# Altium PCB Farm_Assistor_Final.PcbDoc
Units mm, origin at the board's own origin, x right, y up, seen from the top; angles counter-clockwise.
Board outline 64.01 x 58.55 mm, 2 copper layers (Top Layer, Bottom Layer); 46 components, 33 nets, 172 pads, 102 vias.
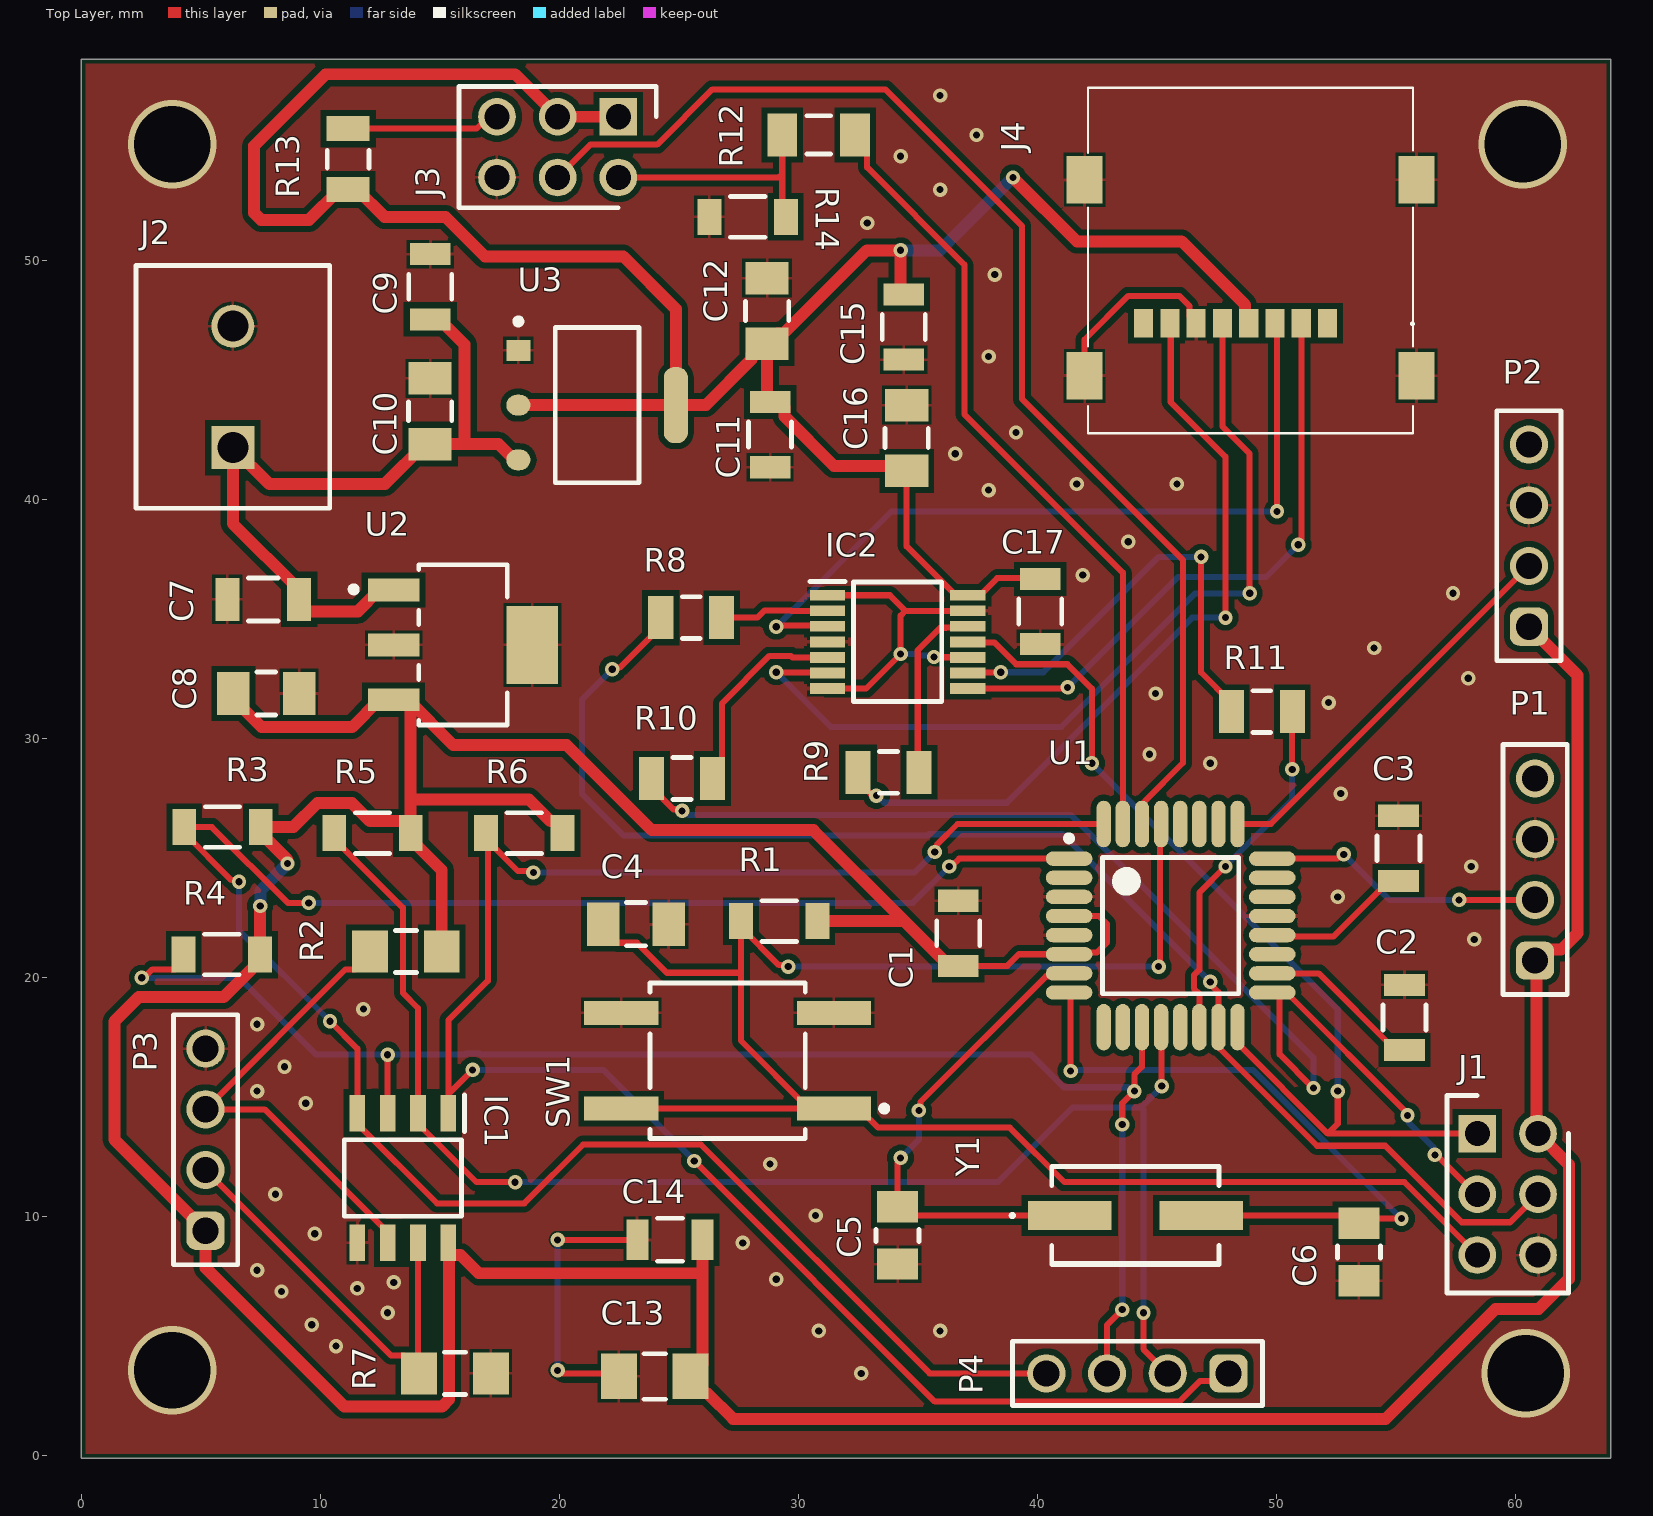
[diagram p0: Top Layer view]
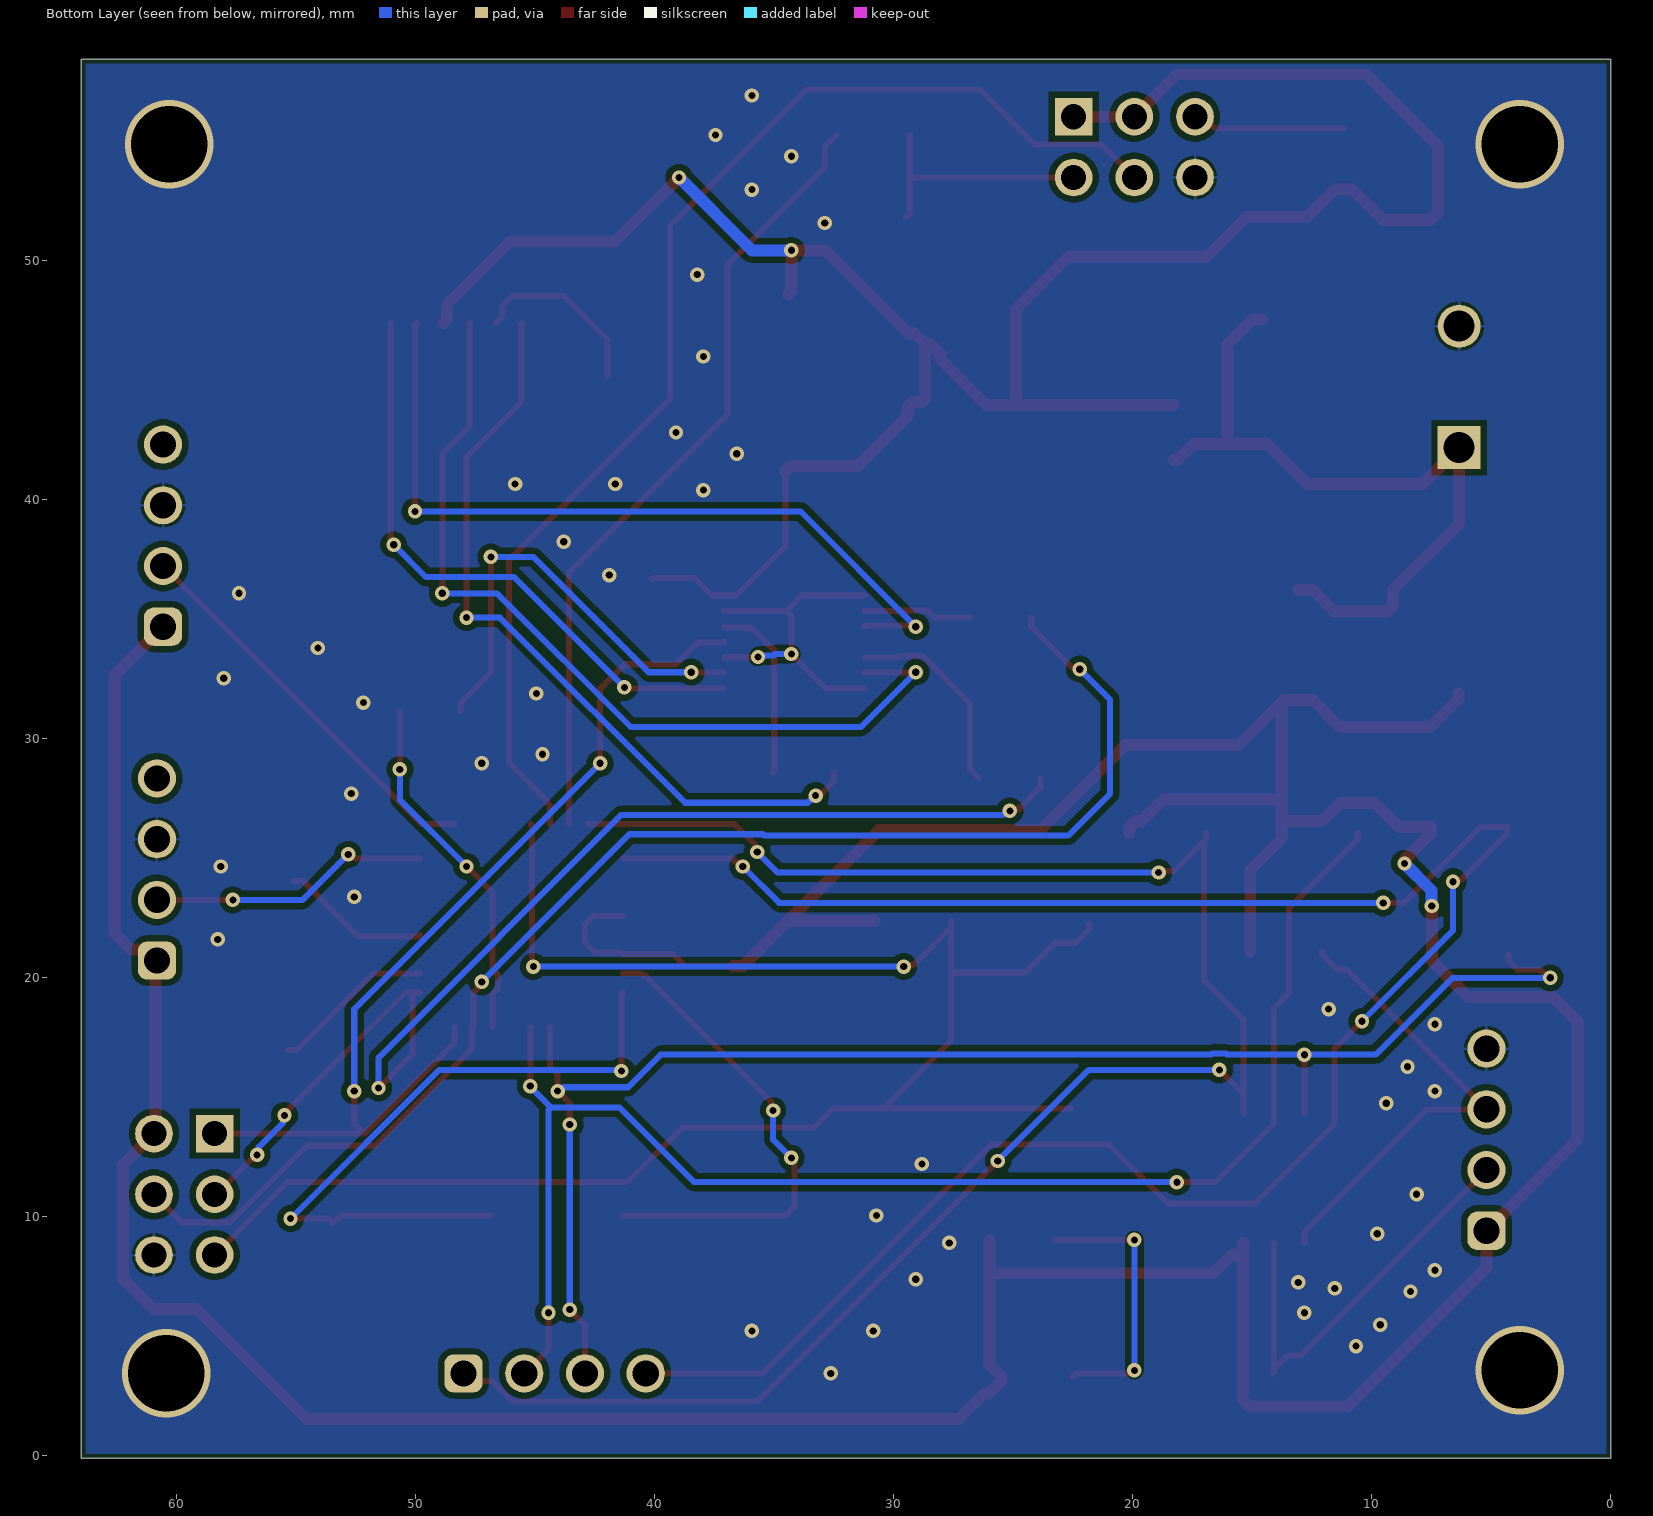
[diagram p1: Bottom Layer view, seen from below]
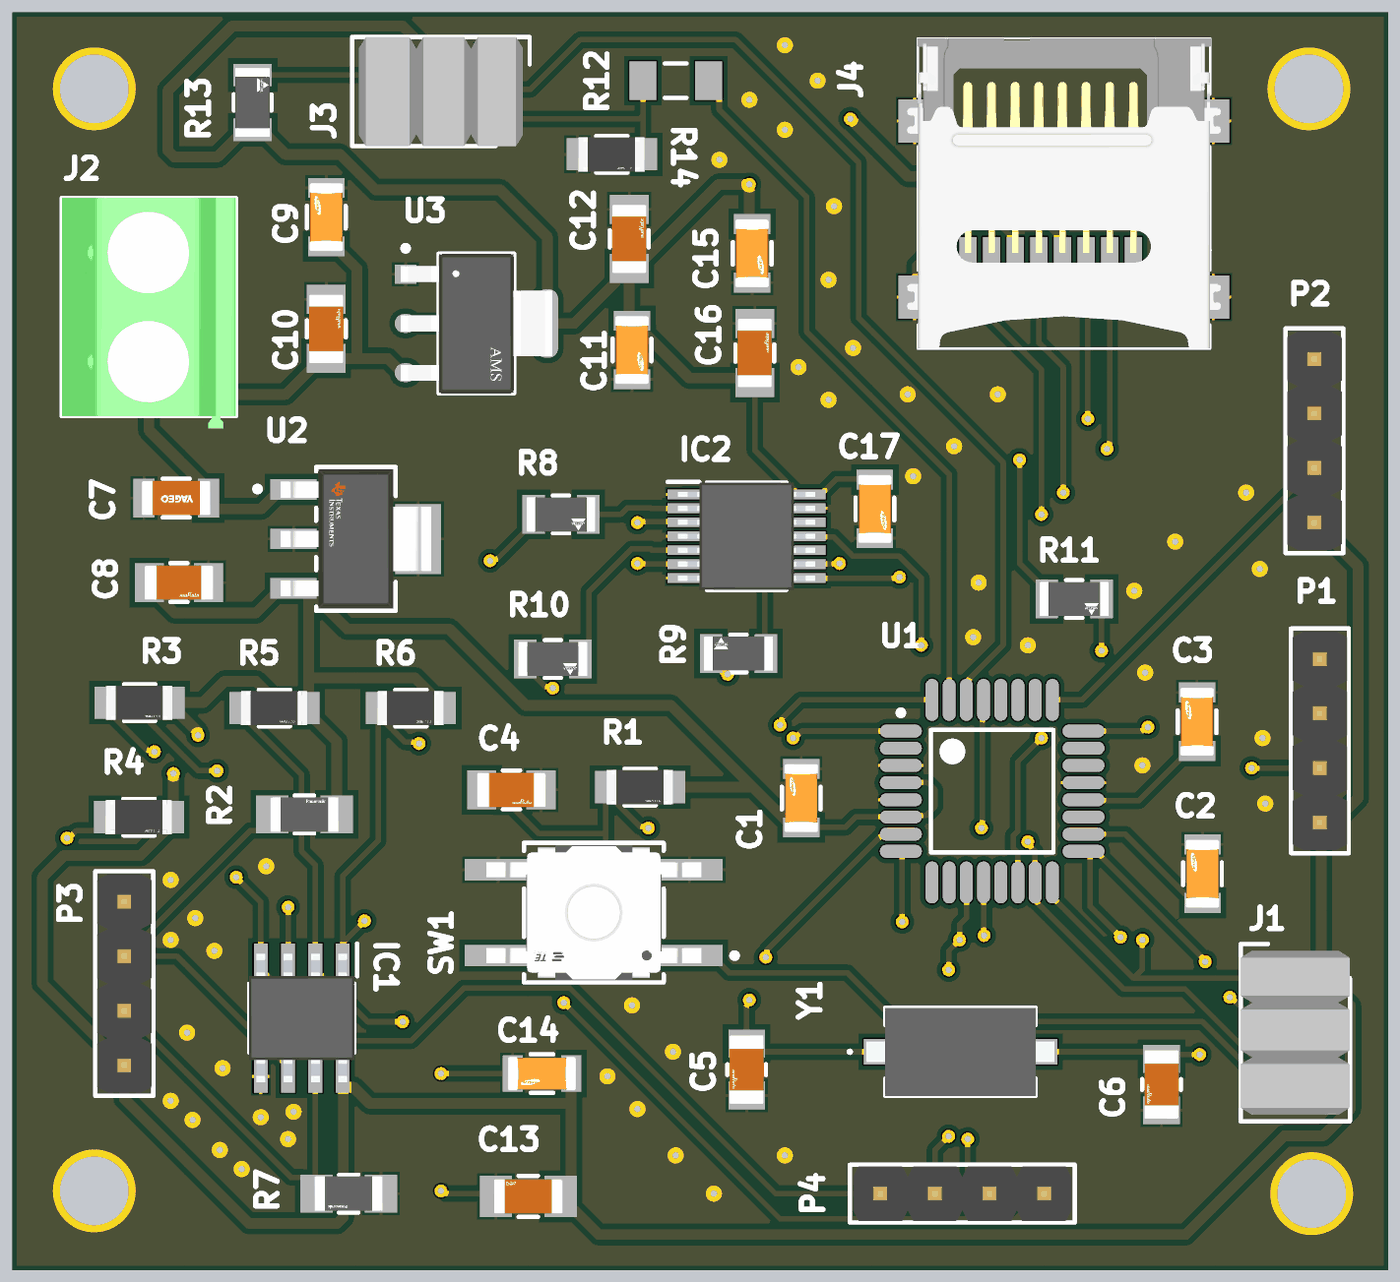
[diagram p2: 3D render of the assembled board from above, using the file's embedded part models]

## Layer stack, top to bottom
Top Solder: solder mask 0.0102, Solder Resist, Dk 3.5
Top Layer: signal copper 0.0356
Dielectric 1: dielectric 0.32, FR-4, Dk 4.8
Bottom Layer: signal copper 0.0356
Bottom Solder: solder mask 0.0102, Solder Resist, Dk 3.5

## Board outline
0,-0.127 64.008,-0.127 64.008,58.42 0,58.42

## Design rules (kind name [scope] priority, off if disabled: settings)
BoardOutlineClearance [All] p1: gap=0.2 ignorepadtopadclearanceinfootprint=FALSE
Clearance [All] p1: gap=0.254 ignorepadtopadclearanceinfootprint=FALSE except(0.127: SMDPad-SMDPad)
ComponentClearance [All] p1: gap=0.127 collisioncheckmode=3 verticalgap=0.127 showdistances=TRUE
DiffPairsRouting [All] p1: maxlimit=0.254 minlimit=0.127 mostfreqgap=0.127 toplayer_minwidth=0.127 toplayer_maxwidth=25.4 toplayer_prefwidth=0.127 bottomlayer_minwidth=0.127 bottomlayer_maxwidth=25.4 bottomlayer_prefwidth=0.127 maxuncoupledlength=12.7
Height [All] p1: minheight=0 maxheight=1816.048 prefheight=12.7
HoleSize [All] p1: absolutevalues=TRUE maxlimit=6.3 minlimit=0.3 maxpercent=80.000 minpercent=20.000
HoleToHoleClearance [All] p1: gap=0.5 allowstackedmicrovias=FALSE
MinimumAnnularRing [All] p1: minimumring=0.076
MinimumSolderMaskSliver [All] p1: minsoldermaskwidth=0
PlaneClearance [All] p1: clearance=0.127
PlaneConnect PlaneConnectPowerPads [InPadClass('PowerPads')] p1: planeconnectstyle=Direct reliefexpansion=0.508 reliefentries=4 reliefconductorwidth=0.254 reliefairgap=0.254
PlaneConnect [All] p2: pad.planeconnectstyle=Relief pad.reliefexpansion=0.3 pad.reliefentries=4 pad.reliefconductorwidth=0.127 pad.reliefairgap=0.127 via.planeconnectstyle=Direct via.reliefexpansion=0.3 via.reliefentries=4 via.reliefconductorwidth=0.127 via.reliefairgap=0.127
PolygonConnect PolygonConnectPowerPads [All vs (InPadClass('PowerPads'))] p1: connectstyle=Direct reliefconductorwidth=0.254 reliefentries=4 polygonreliefangle="90 Angle" airgapwidth=0.254
PolygonConnect [All] p2: thpad.connectstyle=Relief thpad.reliefconductorwidth=0.127 thpad.reliefentries=4 thpad.polygonreliefangle="90 Angle" thpad.airgapwidth=0.127 smdpad.connectstyle=Relief smdpad.reliefconductorwidth=0.127 smdpad.reliefentries=4 smdpad.polygonreliefangle="90 Angle" smdpad.airgapwidth=0.127 via.connectstyle=Direct via.reliefconductorwidth=0.127 via.reliefentries=4 via.polygonreliefangle="90 Angle" via.airgapwidth=0.127
RoutingVias [All] p1: holewidth=0.3 width=0.6 viastyle="Through Hole" minholewidth=0.3 minwidth=0.6 maxholewidth=3.6 maxwidth=6.6
SilkToSilkClearance [All] p1: silktosilkclearance=0
SilkToSolderMaskClearance [IsPad] p1: minsilkscreentomaskgap=0 clearancetoexposedcopper=TRUE
SolderMaskExpansion [All] p1: expansion=0.075 istentingtop=FALSE
UnRoutedNet [All] p1: checkbadconnections=TRUE
Width [All] p1: maxlimit=0.5 minlimit=0.2 preferedwidth=0.254
19 further rules are at their usual default settings.

## Classes and differential pairs
component class "Sensor inputs": C13 C14 IC1 P1 P2 P3 P4 R2 R3 R4 R5 R6 R7
component class Power: C7 C8 C9 C10 C11 C12 U2 U3
component class MCU: C1 C2 C3 C4 C5 C6 J1 R1 SW1 U1 Y1
component class "Data Logger": C15 C16 C17 IC2 J4 R8 R9 R10 R11 R12 R13

## Components (designator, comment, footprint, x,y, rotation, side; value= is the part's Value field where it differs from the comment)
C1 "CL31B106KBHNNNE" FP-CL31B106KBHNNNE-MFG 36.703,21.844 r90 top value=10uF
C2 "CL31B106KBHNNNE" FP-CL31B106KBHNNNE-MFG 55.372,18.323 r90 top value=10uF
C3 "CL31B106KBHNNNE" FP-CL31B106KBHNNNE-MFG 55.118,25.4 r90 top value=10uF
C4 "GRM31C5C1H104JA01L" FP-GRM31C-0_2-e0_3_0_8-IPC_B 23.22,22.225 r0 top
C5 "GRM31A5C2J220JW01D" FP-GRM31A-0_2-e0_3_0_95-IPC_C 34.163,9.202 r270 top
C6 "GRM31A5C2J220JW01D" FP-GRM31A-0_2-e0_3_0_95-IPC_C 53.467,8.509 r270 top
C7 "CC1206KKX7R0BB334" FP-CC1206-0_3-1_8-MFG 7.62,35.814 r180 top value=330nF
C8 "GRM31C5C1H104JA01L" FP-GRM31C-0_2-e0_3_0_8-IPC_B 7.747,31.877 r0 top
C9 "CL31B106KBHNNNE" FP-CL31B106KBHNNNE-MFG 14.605,48.895 r90 top value=10uF
C10 "GRM31C5C1H104JA01L" FP-GRM31C-0_2-e0_3_0_8-IPC_B 14.605,43.688 r90 top
C11 "CL31B106KBHNNNE" FP-CL31B106KBHNNNE-MFG 28.829,42.707 r270 top value=10uF
C12 "GRM31C5C1H104JA01L" FP-GRM31C-0_2-e0_3_0_8-IPC_B 28.702,47.879 r90 top
C13 "12061C105K4T2A" FP-1206-L_3_2_0_2-W_1_6_0-IPC_A 24.003,3.302 r180 top
C14 "CL31B106KBHNNNE" FP-CL31B106KBHNNNE-MFG 24.638,9.017 r180 top value=10uF
C15 "CL31B106KBHNNNE" FP-CL31B106KBHNNNE-MFG 34.417,47.209 r270 top value=10uF
C16 "GRM31C5C1H104JA01L" FP-GRM31C-0_2-e0_3_0_8-IPC_B 34.544,42.566 r90 top
C17 "CL31B106KBHNNNE" FP-CL31B106KBHNNNE-MFG 40.132,35.306 r270 top value=10uF
IC1 "MAX485CSA+" SOIC127P600X175-8N 13.462,11.602 r270 top
IC2 "74LVC125APW-Q100J" SOP65P640X110-14N 34.163,34.036 r0 top
J1 "10-89-7062" HDRV6W87P254_2X3_775X508X864P 58.42,13.462 r270 top
J2 "1729128" PHOE-1729128-2_V 6.35,44.704 r90 top
J3 "10-89-7062" HDRV6W87P254_2X3_775X508X864P 22.479,56.007 r180 top
J4 "MEM2067-02-180-00-A" MEM20670218000A 48.929,45.171 r0 top
P1 "61300411121" 61300411121 60.833,24.511 r90 top
P2 "61300411121" 61300411121 60.579,38.481 r90 top
P3 "61300411121" 61300411121 5.207,13.208 r90 top
P4 "61300411121" 61300411121 44.196,3.429 r180 top
R1 "RT1206BRD0710KL" FP-RT1206-MFG 29.21,22.352 r0 top value=10KΩ
R2 "ERA8AEB203V" FP-ERA8A-IPC_A 13.589,21.082 r0 top
R3 "RT1206BRD0710KL" FP-RT1206-MFG 5.918,26.289 r0 top value=10KΩ
R4 "RT1206BRD0710KL" FP-RT1206-MFG 5.893,20.955 r0 top value=10KΩ
R5 "RT1206BRD0710KL" FP-RT1206-MFG 12.192,26.035 r0 top value=10KΩ
R6 "RT1206BRD0710KL" FP-RT1206-MFG 18.542,26.035 r0 top value=10KΩ
R7 "ERA8AEB203V" FP-ERA8A-IPC_A 15.644,3.429 r180 top
R8 "CRCW12063K30FKEA" FP-CRCW1206-e3-MFG 25.527,35.052 r0 top
R9 "CRCW12063K30FKEA" FP-CRCW1206-e3-MFG 33.782,28.575 r180 top
R10 "CRCW12063K30FKEA" FP-CRCW1206-e3-MFG 25.146,28.321 r0 top
R11 "CRCW12063K30FKEA" FP-CRCW1206-e3-MFG 49.403,31.115 r0 top
R12 "RT1206FRE071KL" RESC3116X65X40ML10T20 30.862,55.245 r0 top value=1k
R13 "CRCW12063K30FKEA" FP-CRCW1206-e3-MFG 11.176,54.234 r90 top
R14 "RT1206BRD072K2L" FP-RT1206-MFG 27.889,51.816 r0 top value=2.2KΩ
SW1 "1571634-2" FP-1571634-2-MFG 27.051,16.51 r180 top
U1 "ATmega328P-AU" 32A_M 45.587,22.166 r0 top
U2 "LM7805MP/NOPB" FP-DCY0004A-MFG 15.981,33.909 r0 top
U3 "AMS1117-3.3" FP-AMS1117-IPC_C 21.59,43.942 r0 top
Y1 "ECS-160-20-3X-TR" ECS160203XTR 44.113,10.033 r0 top

## Footprints (in the part's own frame and the unit in brackets; to place one, negate y for a bottom-side part, rotate by r counter-clockwise, add the part's x,y. Pads: shape width x height; smd on the part's side, far side on the other; paste and mask are expansions set on the pad)
32A_M [mm] "Thin QFP, 32-Leads, Body 7x7mm, Pitch 0.8mm, IPC Low Density"
  oval 1.95x0.6 smd: 1(-4.25,2.8) 2(-4.25,2) 3(-4.25,1.2) 4(-4.25,0.4) 5(-4.25,-0.4) 6(-4.25,-1.2) 7(-4.25,-2) 8(-4.25,-2.8) 17(4.25,-2.8) 18(4.25,-2) 19(4.25,-1.2) 20(4.25,-0.4) 21(4.25,0.4) 22(4.25,1.2) 23(4.25,2) 24(4.25,2.8)
  oval 0.6x1.95 smd: 9(-2.8,-4.25) 10(-2,-4.25) 11(-1.2,-4.25) 12(-0.4,-4.25) 13(0.4,-4.25) 14(1.2,-4.25) 15(2,-4.25) 16(2.8,-4.25) 25(2.8,4.25) 26(2,4.25) 27(1.2,4.25) 28(0.4,4.25) 29(-0.4,4.25) 30(-1.2,4.25) 31(-2,4.25) 32(-2.8,4.25)
  silkscreen extent -4.37,-2.85 2.85,3.77, body extent -3.5,-3.5 3.5,3.5, height 1.2
61300411121 [mm] "Pin Header, pitch 2.54 mm, THT, Vertical, single row, 4p"
  rrect50% 1.6x1.6 hole 1.1: 1(-3.81,0)
  round 1.6 hole 1.1: 2(-1.27,0) 3(1.27,0) 4(3.81,0)
  silkscreen extent -5.23,-1.35 5.23,1.35, body extent -5.08,-1.27 5.08,1.27, height 8.57
ECS160203XTR [mm]
  rect 3.5x1.2 smd: 1(-2.75,0) 2(2.75,0)
  silkscreen extent -5.2,-2.05 3.5,2.05, body extent -4.38,-2.05 4.38,2.05, height 2.4
FP-1206-L_3_2_0_2-W_1_6_0-IPC_A [mm]
  rect 1.505x1.906 smd paste+0 mask+0: 1(-1.501,0) 2(1.501,0)
  silkscreen extent -0.45,-0.95 0.45,0.95, body extent -2.75,-1.45 2.75,1.45, height 0.25
FP-1571634-2-MFG [mm]
  rect 3.1x1 smd paste+0 mask+0: 1(-4.45,2) 2(4.45,2) 3(-4.45,-2) 4(4.45,-2)
  silkscreen extent -6.68,-3.25 3.25,3.25, body extent -6.1,-3.35 6.1,3.35, height 0.25
FP-AMS1117-IPC_C [mm]
  rect 1.004x0.872 smd paste+0 mask+0: 1(-3.295,2.29)
  rrect100% 1.004x0.872 smd paste+0 mask+0: 2(-3.295,0) 3(-3.295,-2.29)
  rrect87% 1.004x3.182 smd paste+0 mask+0: 4(3.295,0)
  silkscreen extent -3.42,-3.25 1.75,3.62, body extent -3.9,-3.35 3.9,3.35, height 0.25
FP-CC1206-0_3-1_8-MFG [mm]
  rect 1x1.8 smd paste+0 mask+0: 1(-1.5,0) 2(1.5,0)
  silkscreen extent -0.63,-0.9 0.63,0.9, body extent -2.32,-1.38 2.32,1.38, height 0.25
FP-CL31B106KBHNNNE-MFG [mm]
  rect 0.925x1.7 smd paste+0 mask+0: 1(-1.362,0) 2(1.362,0)
  silkscreen extent -0.53,-0.9 0.53,0.9, body extent -1.92,-1 1.92,1, height 0.25
FP-CRCW1206-e3-MFG [mm]
  rect 1.05x1.8 smd paste+0 mask+0: 1(-1.275,0) 2(1.275,0)
  silkscreen extent -0.38,-0.87 0.38,0.87, body extent -1.9,-1 1.9,1, height 0.25
FP-DCY0004A-MFG [mm]
  rect 2.15x0.95 smd paste+0 mask+0: 1(-2.9,2.3) 2(-2.9,0) 3(-2.9,-2.3)
  rect 2.15x3.25 smd paste+0 mask+0: 4(2.9,0)
  silkscreen extent -4.7,-3.35 1.85,3.35, body extent -4.08,-3.45 4.08,3.45, height 0.25
FP-ERA8A-IPC_A [mm]
  rect 1.505x1.762 smd paste+0 mask+0: 1(-1.501,0) 2(1.501,0)
  silkscreen extent -0.45,-0.88 0.45,0.88, body extent -2.75,-1.38 2.75,1.38, height 0.25
FP-GRM31A-0_2-e0_3_0_95-IPC_C [mm]
  rect 1.304x1.706 smd paste+0 mask+0: 1(-1.201,0) 2(1.201,0)
  silkscreen extent -0.25,-0.9 0.25,0.9, body extent -1.95,-1 1.95,1, height 0.25
FP-GRM31C-0_2-e0_3_0_8-IPC_B [mm]
  rect 1.355x1.806 smd paste+0 mask+0: 1(-1.376,0) 2(1.376,0)
  silkscreen extent -0.4,-0.9 0.4,0.9, body extent -2.3,-1.15 2.3,1.15, height 0.25
FP-RT1206-MFG [mm]
  rect 1x1.5 smd paste+0 mask+0: 1(-1.6,0) 2(1.6,0)
  silkscreen extent -0.72,-0.85 0.72,0.85, body extent -2.2,-0.95 2.2,0.95, height 0.25
HDRV6W87P254_2X3_775X508X864P [mm]
  rect 1.575x1.575 hole 1.05: 1(0,0)
  round 1.575 hole 1.05: 2(0,2.54) 3(2.54,0) 4(2.54,2.54) 5(5.08,0) 6(5.08,2.54)
  silkscreen extent -1.59,-1.27 6.67,3.81, body extent -1.27,-1.27 6.35,3.81, height 8.38
MEM20670218000A [mm]
  rect 1.5x2 smd: MP1(-6.945,0) MP2(6.945,0) MP3(6.945,8.2) MP4(-6.945,8.2)
  rect 0.8x1.2 smd: P1(3.225,2.2) P2(2.125,2.2) P3(1.025,2.2) P4(-0.075,2.2) P5(-1.175,2.2) P6(-2.275,2.2) P7(-3.375,2.2) P8(-4.475,2.2)
  silkscreen extent -6.8,-2.4 6.82,12.05, body extent -7.3,-2.4 7.3,12.06, height 1.8
PHOE-1729128-2_V [mm] "Receptacle, 2-Leads, Body 8.1x10.16mm, Pitch 5.08mm"
  rect 1.8x1.8 hole 1.3: 1(-2.54,0)
  round 1.8 hole 1.3: 2(2.54,0)
  silkscreen extent -5.08,-4.05 5.08,4.05, body extent -5.65,-4.05 5.08,4.05, height 10.01
RESC3116X65X40ML10T20 [mm] "Chip Resistor, 2-Leads, Body 3.10x1.60mm, IPC Low Density"
  rect 1.25x1.8 smd: 1(-1.525,0) 2(1.525,0)
  silkscreen extent -0.5,-0.8 0.5,0.8, body extent -1.6,-0.85 1.6,0.85, height 0.65
SOIC127P600X175-8N [mm]
  rect 1.525x0.65 smd: 1(-2.712,1.905) 2(-2.712,0.635) 3(-2.712,-0.635) 4(-2.712,-1.905) 5(2.712,-1.905) 6(2.712,-0.635) 7(2.712,0.635) 8(2.712,1.905)
  silkscreen extent -3.47,-2.45 1.6,2.58, body extent -3,-2.45 3,2.45, height 1.75
SOP65P640X110-14N [mm]
  rect 1.475x0.45 smd: 1(-2.938,1.95) 2(-2.938,1.3) 3(-2.938,0.65) 4(-2.938,0) 5(-2.938,-0.65) 6(-2.938,-1.3) 7(-2.938,-1.95) 8(2.938,-1.95) 9(2.938,-1.3) 10(2.938,-0.65) 11(2.938,0) 12(2.938,0.65) 13(2.938,1.3) 14(2.938,1.95)
  silkscreen extent -3.67,-2.5 1.85,2.52, body extent -3.2,-2.5 3.2,2.5, height 1.1

## Part data
C1 C2 C3 C9 C11 C14 C15 C17: library part CMP-2000-07530-2, "CAP CER 10UF 50V X7R 1206", Capacitance=10uF, Manufacturer=Samsung, Temperature="-55°C to +125°C", Temperature Characteristic=X7R, Temperature Coefficient=15%, Temperature Range High=+125°C, Temperature Range Low=-55°C, Tolerance=10%, Voltage Rating=50V, Automotive=No, Category=Cap, ComponentLink2Description=Datasheet, ComponentLink2URL=http://www.samsungsem.com/global/front/downloadcms.do?path=%2F%2Fglobal%2F%2Fsupport%2F%2Fproduct-search%2F%2Fmlcc%2F%2F__icsFiles%2F%2Fafieldfile%2F%2F2019%2F%2F06%2F%2F18&fileName=CL31B106KBHNNNE-19.pdf, Device Class L1="Passive Components", Device Class L2=Capacitors, Device Class L3="Ceramic Capacitors", Digikey Description="CAP CER 10UF 50V X7R 1206", Height=1.8mm, Lead Free=Yes, Manufacturer Part Number=CL31B106KBHNNNE, Material=Ceramic, Octopart=https://octopart.com/cl31b106kbhnnne-samsung-30507377, Package=CL31B106KBHNNNE, RoHS=TRUE
C4 C8 C10 C12 C16: library part CMP-06035-003994-1, "Chip Multilayer Ceramic Capacitors for General Purpose, 1206, 0.10uF, C0G, 30ppm/°C, 5%, 50V", Capacitance=100nF, Case Code (Imperial)=1206, Case Code (Metric)=3216, Dielectric=C0G, Max Operating Temperature=125°C, Min Operating Temperature=-55°C, Package Quantity=1, Temperature Coefficient=30ppm/°C, Tolerance=5%, Voltage=50V, Case/Package=1206, Depth=1.6mm, Height=1.6mm, Lead Free="Lead Free", Length=3.2mm, Material=Ceramic, Mount="Surface Mount", Packaging="Tape and Reel", Radiation Hardening=No, REACH SVHC="No SVHC", Termination=SMD/SMT, Thickness=0.071inch, Voltage Rating=50V, Voltage Rating (DC)=50V, Weight=0.000571oz, Width=0.063inch
C5 C6: library part CMP-06035-015531-1, "Chip Multilayer Ceramic Capacitors for General Purpose, 1206, 22pF, C0G, 30ppm/°C, 5%, 630V", Capacitance=22pF, Case Code (Imperial)=1206, Case Code (Metric)=3216, Dielectric=C0G, Max Operating Temperature=125°C, Min Operating Temperature=-55°C, Package Quantity=4000, Tolerance=5%, Voltage=630V, Case/Package=1206, Depth=1.6mm, Height=1mm, Lead Free="Lead Free", Length=3.2mm, Mount="Surface Mount", Packaging="Tape and Reel", Radiation Hardening=No, REACH SVHC="No SVHC", Termination=SMD/SMT, Thickness=0.039inch, Voltage Rating=630V, Voltage Rating (DC)=630V, Width=0.063inch
C7: library part CMP-03422-001408-1, "CAP CER X7R 1206", RoHS Compliant=Yes
C13: library part CMP-04427-018965-1, "Automotive Ceramic Capacitor, 1206, 1uF, 10%, X7R, 15%,", Capacitance=1uF, Case Code (Imperial)=1206, Case Code (Metric)=3216, Dielectric=X7R, Max Operating Temperature=125°C, Min Operating Temperature=-55°C, Ratings=AEC-Q200, Tolerance=10%, Voltage Rating=100V, Case/Package=1206, Construction=Flat, Depth=1.6mm, Height=0.94mm, Lead Free="Lead Free", Length=3.2mm, Mount="Surface Mount", Packaging="Tape and Reel", Radiation Hardening=No, REACH SVHC="No SVHC", RoHS Compliant=Yes, Series=-, Termination=SMD/SMT, Thickness=0.06inch, Voltage Rating (DC)=100V, Weight=0.000571oz, Width=0.063inch
IC1: "Integrated Circuit", Manufacturer_Name="Analog Devices", Mouser Part Number=700-MAX485CSA, Arrow Part Number=MAX485CSA+, Arrow Price/Stock=https://www.arrow.com/en/products/max485csa/analog-devices?region=nac, Datasheet Link=http://datasheets.maximintegrated.com/en/ds/MAX1487-MAX491.pdf, Height=1.75mm, Manufacturer_Part_Number=MAX485CSA+, Mouser Price/Stock=https://www.mouser.co.uk/ProductDetail/Analog-Devices-Maxim-Integrated/MAX485CSA%2b?qs=1THa7WoU59EQmpurcwoy4Q%3D%3D
IC2: "Integrated Circuit", Manufacturer_Name=Nexperia, Mouser Part Number=771-74LVC125APWQ100J, Arrow Part Number=74LVC125APW-Q100J, Arrow Price/Stock=https://www.arrow.com/en/products/74lvc125apw-q100j/nexperia?region=europe, Datasheet Link=https://assets.nexperia.com/documents/data-sheet/74LVC125A_Q100.pdf, Height=1.1mm, Manufacturer_Part_Number=74LVC125APW-Q100J, Mouser Price/Stock=https://www.mouser.co.uk/ProductDetail/Nexperia/74LVC125APW-Q100J?qs=fi7yB2oewZnvEQIDK5FFLg%3D%3D
J1 J3: "Connector", Manufacturer_Name=Molex, Mouser Part Number=538-10-89-7062, Datasheet Link=https://componentsearchengine.com/Datasheets/1/10-89-7062.pdf, Height=8.64mm, Manufacturer_Part_Number=10-89-7062, Mouser Price/Stock=https://www.mouser.co.uk/ProductDetail/Molex/10-89-7062?qs=tRPrwvvr%2Fuh8n6rY9aRt4Q%3D%3D
J2: library part CMP-2000-05815-1, "PCB Terminal Block, 13.5 A, 400 V, 2-Pin THD, RoHS, Bulk", Current Rating=13500mA, Manufacturer="Phoenix Contact", Package Description="2-Pin Through Hole Device, Body 8.1 x 10.16 mm, Pitch 5.08 mm", Package Reference=1729128-2, Package Version=03/2015, Voltage Rating=400V, Datasheet URL=https://datasheet.ciiva.com/16046/1729128-16046181.pdf, Datasheet Version=12/2013, Manufacturer URL=http://www.phoenixcontact.com/, Mounting Technology=ThroughHole, No. of Positions=2, No. of Rows=1, Orientation=Horizontal, Package URL=https://www.phoenixcontact.com/online/portal/pi/pxc/product_detail_page/!ut/p/b1/3VdJjqNKFDxLH8AFycySyWY2ozFsEPOMMQaDOX1XedGL_1Vdm5YXJleknhSKeBkvI6EA8ncAo3AYoDhBQGco6KN7VURTdemj9us_IEKEZo_YHiPAEWEFmDGOHMORkqKYCORBZxgL7ZoaZYcbFFUZ3fqxSY6GOuxydWUuHqz1ynmMFygu583Bob0Ewr6Sd_l-5m-kAueHiB0jpRwZwe58wwtkpxtMYd_LmGcDRU02dRNEyWt6Y2ti5pSyJ_reIkzIulrqApdnbT11V5jnCKbYNCvhEM1MCpPByat_X379-iThf08CI5GfOPqfBeS3BRoBOdD55AKVv0iLwCMq-2BrzXWSGRH7pUGD9uwXQjiph3xL0DKQwdGa0JImiIOmBNOestqgwTHSSs2oOep-78apyXQBvNi8ZLaFjvjWvcaUEBu0MC6Wbe-d6mB0FAebo2lUWinqYaZs5DAYzV0RP9yitUjnGJ0iI9xhZkT42OCQNUJJhkgWINNQLP2JFP6OpMg3JCVg70jqHT0lvKOnhHf0lPuOnnLf0VPuWx6_dxwUIvwk5WMkT0kLL1mh61l2yZVSzG3pYV_bqo-mj6uMKwKwdnnW8Jh5RTOJzMOA5c-eJDaZQw4mTMPH02PvS_ZAqNVjVTo2WyYLkwH_KU1mmmG5kjRhDqPXLwwVHvVOjCM60-fpXvTDfMGW1PVFVS1r4e4yVDk4ZdNbkUHvqPqQSeian4UD39fNKmachqdJ1NJbyk8rXT9mXTvPk3oE5meulKGgiruPJek-4I9hTT6G8ZLOyRSm2RRVbThERQad5OS28hdt4YW4vG0stgYYzsWsK4_7y6DZMjJSCqri1kyiZR5vD7pwIrNR7QwPHTcLTI5qT7eRlpHrdGiupYlqQDJ7zy_CND8fWWBoLRXxk1RVcXiBQwbTD4Xi7KL-FuO94t9xaqweXzH, Packing=Bulk, PartNumber=1729128, Pitch=5.08mm, RoHS=TRUE
J4: "Connector", Manufacturer_Name="GCT (GLOBAL CONNECTOR TECHNOLOGY)", Mouser Part Number=640-MEM20670218000A, Datasheet Link=https://gct.co/files/drawings/mem2067.pdf, Height=1.95mm, Manufacturer_Part_Number=MEM2067-02-180-00-A, Mouser Price/Stock=https://www.mouser.co.uk/ProductDetail/GCT/MEM2067-02-180-00-A?qs=KUoIvG%2F9IlYTw%2Fcc1GlNJA%3D%3D
P1 P2 P3 P4: library part CMP-1502-01064-2, Color=Black, Contact Resistance=20mΩ, Current Rating=3A, Max Operating Temperature=105°C, Min Operating Temperature=-40°C, Operating Supply Voltage=250V, Connector Type="Male Pin", Contact Material=Copper, Contact Mating Length=5.9944mm, Contact Plating=Gold, Gender=Male, Height=8.89mm, Lead Free="Lead Free", Lead Pitch=2.54mm, Mount="Through Hole", NexarPartId=32855522, Number of Contacts=4, Number of Pins=4, Number of Positions=4, Number of Rows=1, Orientation=Vertical, Packaging=Bulk, Pitch=2.54mm, REACH SVHC=Unknown, RoHS=Compliant, Termination=Solder, Voltage Rating=250V
R1 R3 R4 R5 R6: library part CMP-2003-04273-2, "RES 10.0K OHM 1/4W .1% SMD 1206", Manufacturer=Yageo, Package=RT1206, Power Rating=0.25W, Resistance=10KΩ, Temperature="-55°C to +155°C", Temperature Coefficient="25 ppm/°C", Temperature Range High=+155°C, Temperature Range Low=-55°C, Tolerance=0.005, Voltage Rating=200V, Automotive=No, Category=Res, ComponentLink2Description=Datasheet, ComponentLink2URL=http://www.yageo.com/documents/recent/PYu-RT_1-to-0.01_RoHS_L_9.pdf, Composition="Thin Film", Device Class L1="Passive Components", Device Class L2=Resistors, Device Class L3="Chip SMD Resistors", Digikey Description="RES 10.0K OHM 1/4W .1% SMD 1206", Footprint Url=http://www.yageo.com/exep/pages/download/literatures/PYu-R_Mount_10.pdf, Height=0.65mm, Ipc Land Pattern Name=RESC310160X55, Lead Free=Yes, Manufacturer Part Number=RT1206BRD0710KL, Mouser Description="High Precision-High Stability Chip Resistor Thin Film 1206 10kOhm 0.1% Paper T/R", Octopart=https://octopart.com/rt1206brd0710kl-yageo-1397513, RoHS=TRUE, Series=RT
R2 R7: library part CMP-2003-04436-2, "RES SMD 20K OHM 0.1% 1/4W 1206", Case Code (Imperial)=1206, Case Code (Metric)=3216, Max Operating Temperature=155°C, Max Power Dissipation=250mW, Min Operating Temperature=-55°C, Package Quantity=5000, Resistance=20k, Resistance Tolerance=0.1%, Resistor Type="Metal Film", Temperature Coefficient=25ppm/°C, Voltage Rating=150V, Case/Package=1206, Construction=Rectangular, Contact Plating=Tin, Depth=1.6mm, Height=0.6mm, Lead Free="Lead Free", Length=3.2mm, Military Standard=Not, Mount="Surface Mount", Number of Pins=2, Number of Terminations=2, Packaging="Tape and Reel", Power Rating=250mW, Radiation Hardening=No, REACH SVHC="No SVHC", RoHS Compliant=Yes, Series=ERA-8A, Technology="THIN FILM", Termination=SMD/SMT, Tolerance=0.1%, Voltage Rating (DC)=150V, Width=0.063inch
R8 R9 R10 R11 R13: library part CMP-2100-03617-2, "RES Thick Film, 3.3kΩ, 1%, 0.25W, 100ppm/°C, 1206", Case Code (Imperial)=1206, Case Code (Metric)=3216, Max Operating Temperature=155°C, Max Power Dissipation=250mW, Min Operating Temperature=-55°C, Package Quantity=10, Resistance=3.3kR, Temperature Coefficient=100ppm/°C, Tolerance=1%, Voltage Rating=200V, Case/Package=1206, Composition="Thick Film", Contact Plating=Tin, Depth=1.6mm, Features="Automotive AEC-Q200", Height=0.55mm, Lead Free="Lead Free", Length=3.2mm, Military Standard=Not, Number of Terminations=2, Packaging="Tape and Reel", Power Rating=250mW, Radiation Hardening=No, Termination=SMD/SMT, Voltage Rating (DC)=200V, Weight=0.000353oz, Width=1.6mm
R12: library part CMP-2003-04306-1, Manufacturer=Yageo, Part Number=RT1206FRE071KL
R14: library part CMP-2003-04098-2, "RES 2.20K OHM 1/4W .1% SMD 1206", Manufacturer=Yageo, Package=RT1206, Power Rating=0.25W, Resistance=2.2KΩ, Temperature="-55°C to +155°C", Temperature Coefficient="25 ppm/°C", Temperature Range High=+155°C, Temperature Range Low=-55°C, Tolerance=0.005, Voltage Rating=200V, Automotive=No, Category=Res, ComponentLink2Description=Datasheet, ComponentLink2URL=http://www.yageo.com/documents/recent/PYu-RT_1-to-0.01_RoHS_L_9.pdf, Composition="Thin Film", Device Class L1="Passive Components", Device Class L2=Resistors, Device Class L3="Chip SMD Resistors", Digikey Description="RES 2.20K OHM 1/4W .1% SMD 1206", Footprint Url=http://www.yageo.com/exep/pages/download/literatures/PYu-R_Mount_10.pdf, Height=0.65mm, Ipc Land Pattern Name=RESC310160X55, Lead Free=Yes, Manufacturer Part Number=RT1206BRD072K2L, Mouser Description="Thin Film Resistors - SMD 1/4W 2.2K ohm .1% 25ppm", Octopart=https://octopart.com/rt1206brd072k2l-yageo-1194112, RoHS=TRUE, Series=RT
SW1: library part CMP-03407-000008-1, "SWITCH TACTILE SPST-NO 0.05A 24V", Actuator Color=Natural, Case/Package=SMD/SMT, Contact Current Rating=50mA, Max Operating Temperature=85°C, Max Voltage Rating (DC)=12V, Min Operating Temperature=-40°C, Operating Force=160gf, Package Quantity=1000, Actuator Length=0.094inch, Actuator Material=Rubber, Actuator Type=Standard, Contact Material="Stainless Steel", Contact Plating=Silver, Current Rating=50mA, Depth=10mm, ELV=Compliant, Illumination Type=Illuminated, Lead Free="Lead Free", Length=6.2mm, Max Current Rating=50mA, Mechanical Life=5000000Cycles, Mount="Surface Mount", Orientation=Straight, Packaging="Tape and Reel", Radiation Hardening=No, RoHS Compliant=Yes, Switch Function=Off-Mom, Termination="Gull Wing", Throw Configuration=SPST, Type=Switch, Voltage Rating (DC)=12V
U1: library part CMP-0095-00269-2, "8-bit AVR Microcontroller, 32KB Flash, 1KB EEPROM, 2KB SRAM, 32-pin TQFP, Industrial Grade (-40°C to 85°C)", Code_JEDEC=MS-026-ABA, ComponentLink1Description="Manufacturer URL", ComponentLink1URL=http://www.atmel.com/, ComponentLink2Description="ATmega48A/48PA/88A/88PA/168A/168PA/328/328P Datasheet", ComponentLink2URL=http://www.atmel.com/dyn/resources/prod_documents/doc8271.pdf, ComponentLink3Description="ATmega48A/48PA/88A/88PA/168A/168PA/328/328P Summary", ComponentLink3URL=http://www.atmel.com/dyn/resources/prod_documents/8271S.pdf, DatasheetVersion="revD, May-2011", PackageDescription="32-Lead, 7x7x1.0 mm Body, 0.8mm Lead Pitch, Thin Profile Plastic Quad Flat Package (TQFP)", PackageReference=32A, PackageVersion="revC, Oct-2010", RevisionNote="DatasheetVersion & PackageVersion updated. URLs added."
U2: library part CMP-04917-000007-1, "IC REG LINEAR 5V 1.5A SOT223-4", Dropout Voltage=2V, Manufacturer="Texas Instruments", Max Junction Temp=+150°C, Max Supply Voltage=30V, Min Supply Voltage=7.5V, Nominal Supply Current=8mA, Output Current=1.5A, Output Voltage=5V, Package=DCY0004A, Temperature="0°C to +125°C", Temperature Range High=+125°C, Temperature Range Low=0°C, Accuracy Percentage=3%, Automotive=No, Category=IC, ComponentLink2Description=Datasheet, ComponentLink2URL=http://www.ti.com/lit/ds/symlink/lm7800.pdf, Device Class L1="Integrated Circuits (ICs)", Device Class L2="Power Management ICs", Device Class L3="Voltage Regulators - Linear", Digikey Description="IC REG LINEAR 5V 1.5A SOT223-4", Height=1.8mm, Lead Free=Yes, Manufacturer Part Number=LM7805MP/NOPB, Number Of Outputs=1, Octopart=https://octopart.com/lm7805mp%2Fnopb-texas+instruments-74629991, Output Type=Fixed, RoHS=TRUE, Standoff Height=0.02mm
U3: library part CMP-209535-000001-1, "LDO Voltage Regulators 1A, 3.3V", Dropout Voltage=1.1V, Manufacturer="Advanced Monolithic Systems", Max Junction Temp=+125°C, Max Power Dissipation=1.2W, Max Supply Voltage=15V, Nominal Supply Current=5mA, Output Current=1A, Output Voltage=3.3V, Package=AMS1117, Temperature="-40°C to +125°C", Temperature Range Low=-40°C, Automotive=No, Category=IC, ComponentLink2Description=Datasheet, ComponentLink2URL=http://www.advanced-monolithic.com/pdf/ds1117.pdf, Device Class L1="Integrated Circuits (ICs)", Device Class L2="Power Management ICs", Device Class L3="Voltage Regulators - Linear", Height=1.8mm, Ipc Land Pattern Name=SOT229P700X180-4, Lead Free=Yes, Manufacturer Part Number=AMS1117-3.3, Number Of Outputs=1, Octopart=https://octopart.com/ams1117-3.3-advanced+monolithic+systems-25899300, Output Type=Fixed, RoHS=TRUE, Standoff Height=0.64mm, Temperature Range High=+125°C
Y1: "Crystal or Oscillator", Manufacturer_Name=ECS, Mouser Part Number=520-160-20-3XT, Arrow Part Number=ECS-160-20-3X-TR, Arrow Price/Stock=https://www.arrow.com/en/products/ecs-160-20-3x-tr/ecs-international?region=nac, Datasheet Link=https://www.arrow.com/en/products/ecs-160-20-3x-tr/ecs-international, Height=2.3mm, Manufacturer_Part_Number=ECS-160-20-3X-TR, Mouser Price/Stock=https://www.mouser.co.uk/ProductDetail/ECS/ECS-160-20-3X-TR?qs=7Z%2FjUg96RbU1ElbRFXn8Rw%3D%3D

## Via types
v1: diameter 0.6, hole 0.3, Top Layer to Bottom Layer, 98 vias
v2: diameter 3.7, hole 3.2, Top Layer to Bottom Layer, 4 vias

## Nets (pads, with @x,y where several pads share a name; then routed paths per layer and width w, separated by ;. In a path a pad name is that pad's centre, name@x,y a point inside that pad or via, vN(x,y) a via of type N, cw(c..) or ccw(c..) an arc to the next point about the centre after c; other vN are vias at no path point)
3V3: C11.1 C12.1 C15.1 C16.1 C17.1 IC2.14 J3.1 J3.3 J4.P4 R13.1 U3.2 U3.4 | length 103.4
  Top Layer w0.254: C16.1 34.544,38.031 36.588,35.986 IC2.14 37.614,35.986 38.33,36.703 40.097,36.703 C17.1
  Top Layer w0.5: U3.2 U3.4 ; J3.1 J3.3 18.161,57.785 10.229,57.785 7.239,54.795 7.239,51.982 7.532,51.689 9.531,51.689 10.801,52.959 R13.1 11.551,52.959 12.694,51.816 15.24,51.816 16.891,50.165 22.685,50.165 24.885,47.965 U3.4 ; C15.1 34.29,48.699 v1(34.29,50.419) 32.875,50.419 29.386,46.931 29.129,46.931 C12.1 ; C16.1 34.332,41.402 31.496,41.402 29.429,43.469 29.429,43.856 29.216,44.069 C11.1 28.702,44.196 C12.1 ; v1(38.989,53.467) 41.665,50.791 46.047,50.791 48.704,48.134 48.704,47.521 J4.P4 ; U3.4 26.137,43.942 28.049,45.854 28.049,46.076 28.476,46.503 C12.1
  Bottom Layer w0.5: v1(34.29,50.419) 35.941,50.419 v1(38.989,53.467)
CS: IC2.8 J4.P2 | length 25.6
  Top Layer w0.254: IC2.8 41.23,32.086 v1(41.275,32.131) ; v1(50.927,38.1) 50.927,38.194 51.054,38.321 J4.P2
  Bottom Layer w0.254: v1(41.275,32.131) 45.893,36.749 49.576,36.749 v1(50.927,38.1)
GND: C1.2 C2.2 C3.2 C4.2 C5.2 C6.2 C7.2 C8.2 C9.2 C10.2 C11.2 C12.2 C13.2 C14.2 C15.2 C16.2 C17.2 IC1.5 IC2.1 IC2.4 IC2.7 IC2.10 IC2.13 J1.6 J2.2 J3.6 J4.MP1 J4.MP2 J4.MP3 J4.MP4 J4.P6 P1.3 P2.3 P3.4 R7.1 R14.1 SW1.3 SW1.4 U1.3 U1.5 U1.21 U2.2 U2.4 U3.1 | length 33.7
  Top Layer w0.254: v1(19.939,3.556) 20.033,3.556 20.16,3.429 22.375,3.429 C13.2 ; v1(19.939,9.017) C14.2 ; IC2.7 32.848,32.086 v1(34.29,33.528) 34.29,35.138 34.488,35.336 ; IC2.1 33.838,35.986 34.488,35.336 ; v1(35.687,33.401) 35.695,33.393 37.093,33.393 IC2.10 ; IC2.13 34.488,35.336 ; J4.MP1 41.984,46.683 43.815,48.514 45.95,48.514 46.381,48.083 46.381,47.644 J4.P6
  Bottom Layer w0.254: v1(19.939,3.556) v1(19.939,9.017) ; v1(34.29,33.528) 34.971,33.528 35.032,33.467 35.621,33.467 v1(35.687,33.401)
  other v1: 32.639,3.429 10.668,4.572 30.861,5.207 35.941,5.207 9.652,5.461 12.827,5.969 8.382,6.858 11.557,6.985 13.081,7.239 29.083,7.366 7.366,7.747 27.686,8.89 9.779,9.271 30.734,10.033 8.128,10.922 28.829,12.192 9.398,14.732 7.366,15.24 8.509,16.256 7.366,18.034 11.811,18.669 58.293,21.59 52.578,23.368 58.166,24.638 52.705,27.686 47.244,28.956 44.704,29.337 52.197,31.496 44.958,31.877 58.039,32.512 54.102,33.782 57.404,36.068 41.91,36.83 43.815,38.227 37.973,40.386 41.656,40.64 45.847,40.64 36.576,41.91 39.116,42.799 37.973,45.974 38.227,49.403 32.893,51.562 35.941,52.959 34.29,54.356 37.465,55.245 35.941,56.896
  other v2: 60.452,3.429 3.81,3.556 3.81,54.864 60.325,54.864
MISO: IC2.11 J1.1 U1.16 | length 41.3
  Top Layer w0.254: IC2.11 37.132,34.005 38.22,34.005 39.124,33.1 41.269,33.1 42.291,32.078 v1(42.291,28.956) ; U1.16 48.387,17.241 52.166,13.462 ; v1(52.578,15.24) 52.578,13.874 52.166,13.462 ; J1.1 52.166,13.462
  Bottom Layer w0.254: v1(42.291,28.956) 52.578,18.669 v1(52.578,15.24)
MISO_1: J4.P7 R9.2 | length 32.6
  Top Layer w0.254: R9.2 32.507,28.2 33.036,27.671 33.208,27.671 v1(33.274,27.605) ; J4.P7 45.593,47.332 45.593,44.069 47.879,41.783 v1(47.879,35.052)
  Bottom Layer w0.254: v1(33.274,27.605) 33.296,27.605 33.596,27.305 38.735,27.305 46.482,35.052 v1(47.879,35.052)
MOSI: J1.4 R8.1 U1.15 | length 58.2
  Top Layer w0.254: v1(22.225,32.893) 22.291,32.959 22.534,32.959 24.252,34.677 R8.1 ; v1(47.244,19.812) 47.244,19.718 47.587,19.375 U1.15 47.653,17.85 47.653,17.012 51.711,12.954 54.566,12.954 57.767,9.753 59.791,9.753 J1.4
  Bottom Layer w0.254: v1(22.225,32.893) 20.955,31.623 20.955,27.686 22.712,25.929 35.421,25.929 35.48,25.988 41.068,25.988 v1(47.244,19.812)
MOSI_1: IC2.3 J4.P3 | length 33
  Top Layer w0.254: v1(29.083,34.671) 29.125,34.713 31.198,34.713 IC2.3 ; J4.P3 50.038,47.287 v1(50.038,39.497)
  Bottom Layer w0.254: v1(29.083,34.671) 33.909,39.497 v1(50.038,39.497)
NetC2_1: C2.1 U1.18 | length 6.9
  Top Layer w0.254: U1.18 51.779,20.166 54.985,16.96 C2.1
NetC3_1: C3.1 U1.20 | length 6.3
  Top Layer w0.254: U1.20 49.886,21.717 52.41,21.717 54.731,24.038 C3.1
NetC5_1: C5.1 U1.7 Y1.1 | length 20.6
  Top Layer w0.254: v1(34.29,12.446) 34.29,12.352 34.163,12.225 C5.1 34.533,10.033 Y1.1 ; v1(35.052,14.432) 35.118,14.498 35.118,14.785 40.38,20.047 40.449,20.047 40.568,20.166 U1.7
  Bottom Layer w0.254: v1(34.29,12.446) 35.052,13.208 v1(35.052,14.432)
NetC6_1: C6.1 U1.8 Y1.2 | length 28.3
  Top Layer w0.254: U1.8 41.402,19.301 v1(41.402,16.083) ; Y1.2 53.144,10.033 C6.1 53.663,9.906 v1(55.245,9.906)
  Bottom Layer w0.254: v1(41.402,16.083) 41.448,16.129 49.022,16.129 v1(55.245,9.906)
NetC7_1: C7.1 C9.1 C10.1 J2.1 U2.1 U3.3 | length 31.8
  Top Layer w0.5: U2.1 12.481,36.209 11.578,35.306 9.37,35.306 9.12,35.556 C7.1 9.12,36.214 6.35,38.984 J2.1 7.874,40.64 12.707,40.64 14.379,42.312 C10.1 16.037,42.312 ; C9.1 14.992,47.533 16.037,46.488 16.037,42.312 ; U3.3 18.128,41.652 17.468,42.312 16.037,42.312
NetIC1_1: IC1.1 P4.1 R6.1 U1.32 | length 79
  Top Layer w0.254: IC1.1 15.367,14.752 15.367,15.113 ; v1(16.383,16.129) 15.367,15.113 ; R6.1 16.942,25.785 R6.1@17.018,25.709 ; v1(18.923,24.384) 18.857,24.45 18.277,24.45 R6.1@17.018,25.709 ; v1(25.654,12.319) 35.725,2.248 45.955,2.248 46.825,3.118 47.695,3.118 P4.1 ; v1(35.718,25.242) 35.718,25.335 35.814,25.431 35.814,25.56 36.67,26.416 U1.32 ; 15.367,15.113 15.367,18.206 17.018,19.857 R6.1@17.018,25.709
  Bottom Layer w0.254: v1(16.383,16.129) 21.844,16.129 v1(25.654,12.319) ; v1(18.923,24.384) 34.86,24.384 v1(35.718,25.242)
NetIC1_2: IC1.2 P4.2 R5.1 U1.12 | length 61.5
  Top Layer w0.254: R5.1 10.592,25.785 13.462,22.915 13.462,19.349 14.097,18.714 IC1.2 14.097,13.877 16.544,11.43 v1(18.161,11.43) ; v1(44.45,5.969) 44.45,4.445 P4.2 ; U1.12 45.199,17.903 45.199,15.461 v1(45.212,15.448)
  Bottom Layer w0.254: v1(18.161,11.43) 38.354,11.43 41.483,14.559 44.351,14.559 ; v1(44.45,5.969) 44.45,14.46 44.351,14.559 ; v1(45.212,15.448) 45.212,15.42 44.351,14.559
NetIC1_3: IC1.3 P4.3 R4.1 U1.11 | length 63.4
  Top Layer w0.254: v1(2.54,19.981) 2.634,19.981 2.985,20.332 3.92,20.332 4.293,20.705 R4.1 ; IC1.3 v1(12.827,16.764) ; P4.3 42.926,5.461 v1(43.561,6.096) ; v1(43.561,13.843) 43.561,14.732 v1(44.069,15.24) 44.069,15.938 44.387,16.256 U1.11
  Bottom Layer w0.254: v1(2.54,19.981) 6.626,19.981 9.842,16.764 v1(12.827,16.764) 16.055,16.764 16.101,16.81 16.665,16.81 16.711,16.764 39.758,16.764 41.12,15.402 43.813,15.402 43.975,15.24 v1(44.069,15.24) ; v1(43.561,6.096) v1(43.561,13.843)
NetIC1_4: IC1.4 P4.4 R3.1 U1.1 | length 89.9
  Top Layer w0.254: v1(6.604,24.003) 6.538,24.069 6.288,24.069 4.318,26.039 R3.1 5.474,26.289 8.649,23.114 v1(9.525,23.114) ; v1(10.414,18.161) 11.557,17.018 IC1.4 11.557,13.877 14.893,10.541 18.542,10.541 21.001,13 25.936,13 35.507,3.429 P4.4 ; v1(36.322,24.638) 36.416,24.638 36.744,24.966 U1.1
  Bottom Layer w0.254: v1(6.604,24.003) 6.604,21.971 v1(10.414,18.161) ; v1(9.525,23.114) 34.798,23.114 v1(36.322,24.638)
NetIC1_6: IC1.6 P3.3 R2.1 | length 19.9
  Top Layer w0.254: R2.1 12.088,20.953 11.463,20.328 11.057,20.328 P3.3 7.676,14.478 12.827,9.327 IC1.6
NetIC1_7: IC1.7 P3.2 R7.2 | length 17.8
  Top Layer w0.254: P3.2 12.962,4.183 13.518,4.183 R7.2@14.097,3.604 ; IC1.7 R7.2@14.097,3.604 ; R7.2 14.097,3.475 R7.2@14.097,3.604
NetIC2_2: IC2.2 R8.2 | length 4.6
  Top Layer w0.254: R8.2 28.3,35.052 28.6,35.352 29.7,35.352 29.716,35.336 IC2.2
NetIC2_5: IC2.5 R10.2 | length 8.6
  Top Layer w0.254: R10.2 26.819,28.719 26.819,31.465 28.801,33.447 29.699,33.447 29.76,33.386 IC2.5
NetIC2_9: IC2.9 R11.1 | length 18.8
  Top Layer w0.254: IC2.9 37.116,32.751 38.466,32.751 v1(38.481,32.767) ; v1(46.863,37.592) 46.863,32.755 48.128,31.49 R11.1
  Bottom Layer w0.254: v1(38.481,32.767) v1(38.481,32.767) 40.259,32.766 45.085,37.592 v1(46.863,37.592)
NetIC2_12: IC2.12 R9.1 | length 7.6
  Top Layer w0.254: R9.1 35.006,28.626 35.006,33.683 35.951,34.628 36.192,34.628 36.206,34.642 37.057,34.642 IC2.12
NetJ3_2: J3.2 R12.1 R14.2 | length 10.4
  Top Layer w0.254: J3.2 29.198,53.467 29.337,53.606 ; R12.1 29.337,53.606 ; R14.2 29.337,51.968 29.337,53.606
NetJ3_4: J3.4 U1.30 | length 51.8
  Top Layer w0.254: J3.4 21.31,54.838 24.104,54.838 26.416,57.15 33.655,57.15 39.37,51.435 39.37,44.196 46.101,37.465 46.101,28.968 44.506,27.373 44.506,27.304 44.387,27.185 U1.30
NetJ3_5: J3.5 R13.2 | length 6.4
  Top Layer w0.254: R13.2 16.544,55.509 17.042,56.007 J3.5
NetP1_2: P1.2 U1.24 | length 11.9
  Top Layer w0.254: U1.24 52.558,24.966 52.738,25.146 v1(52.832,25.146) ; v1(57.658,23.241) P1.2
  Bottom Layer w0.254: v1(52.832,25.146) 54.737,23.241 v1(57.658,23.241)
NetP2_2: P2.2 U1.25 | length 16.7
  Top Layer w0.254: U1.25 49.784,26.416 P2.2
NetR11_2: R11.2 U1.14 | length 15
  Top Layer w0.254: U1.14 46.787,19.306 46.563,19.53 46.563,20.094 46.787,20.318 46.787,23.546 v1(47.879,24.638) ; v1(50.673,28.702) 50.673,31.11 R11.2
  Bottom Layer w0.254: v1(47.879,24.638) 50.673,27.432 v1(50.673,28.702)
NetR12_2: R12.2 U1.31 | length 33.5
  Top Layer w0.254: R12.2 32.885,54.747 32.885,53.895 36.957,49.823 36.957,43.561 43.587,36.931 U1.31
Reset: C4.1 J1.5 R1.1 SW1.1 SW1.2 U1.29 | length 78.3
  Top Layer w0.254: C4.1 21.844,21.999 22.394,21.449 23.252,21.449 24.508,20.193 27.61,20.193 ; SW1.2 SW1.1@30.451,14.51 ; R1.1 R1.1@27.61,22.102 ; v1(29.591,20.447) 29.525,20.513 29.199,20.513 R1.1@27.61,22.102 ; v1(45.085,20.447) 45.136,20.498 45.136,26.365 U1.29 ; J1.5 55.366,11.436 41.142,11.436 38.862,13.716 33.345,13.716 32.551,14.51 SW1.1 SW1.1@30.451,14.51 ; 27.61,20.193 R1.1@27.61,22.102 ; 27.61,20.193 27.61,17.351 SW1.1@30.451,14.51
  Bottom Layer w0.254: v1(29.591,20.447) v1(45.085,20.447)
SCK: J1.3 R10.1 U1.17 | length 51
  Top Layer w0.254: R10.1 23.871,27.946 24.785,27.032 25.08,27.032 v1(25.146,26.966) ; U1.17 50.005,19.366 U1.17@50.146,19.366 ; v1(51.562,15.367) 50.146,16.783 U1.17@50.146,19.366 ; v1(55.499,14.224) 55.499,14.302 50.435,19.366 U1.17@50.146,19.366 ; v1(56.642,12.573) 56.706,12.573 58.357,10.922 J1.3
  Bottom Layer w0.254: v1(25.146,26.966) 25.24,26.966 25.409,26.797 41.402,26.797 51.562,16.637 v1(51.562,15.367) ; v1(55.499,14.224) 55.565,14.158 55.565,13.904 56.576,12.893 56.576,12.639 v1(56.642,12.573)
SCK_1: IC2.6 J4.P5 | length 37
  Top Layer w0.254: v1(29.083,32.766) 29.098,32.751 31.21,32.751 IC2.6 ; J4.P5 47.754,43.051 48.895,41.91 v1(48.895,36.068)
  Bottom Layer w0.254: v1(29.083,32.766) 31.369,30.48 41.021,30.48 46.609,36.068 v1(48.895,36.068)
VCC: C1.1 C8.1 C13.1 C14.1 IC1.8 J1.2 P1.1 P2.1 P3.1 R1.2 R2.2 R3.2 R4.2 R5.2 R6.2 U1.4 U1.6 U2.3 | length 205.8
  Top Layer w0.254: C1.1 38.755,20.482 39.239,20.966 U1.6 41.403,21.032 42.495,21.032 42.926,21.463 42.926,22.225 42.585,22.566 U1.4
  Top Layer w0.5: C8.1 6.371,31.651 7.553,30.47 11.342,30.47 12.481,31.609 U2.3 U2.3@13.567,31.609 ; v1(7.493,22.987) R4.2 7.493,20.705 5.965,19.177 2.413,19.177 1.397,18.161 1.397,13.208 P3.1 5.207,7.848 11.011,2.044 15.105,2.044 15.4,2.339 IC1.8@15.4,8.42 ; v1(8.636,24.765) 8.617,24.784 8.617,24.94 7.518,26.039 R3.2 8.883,26.289 9.883,27.289 11.336,27.289 12.09,26.535 13.542,26.535 R5.2@13.792,26.285 ; R2.2 15.09,24.487 13.792,25.785 R5.2 R5.2@13.792,26.285 ; IC1.8 15.4,8.857 IC1.8@15.4,8.42 ; R6.2 20.142,26.285 19.892,26.535 19.642,26.535 18.745,27.432 13.792,27.432 ; C14.1 26,7.62 ; R1.2 34.417,22.352 34.431,22.366 ; C1.1 36.316,20.482 34.431,22.366 ; P2.1 62.611,32.639 62.611,21.844 61.925,21.158 61.29,21.158 P1.1 60.896,20.637 60.896,13.525 J1.2 62.252,12.17 62.252,7.388 60.99,6.126 59.184,6.126 54.583,1.524 27.282,1.524 26.207,2.599 26.006,2.599 25.504,3.101 C13.1 26,3.799 26,7.62 ; U2.3@13.567,31.609 13.792,31.384 13.792,27.432 ; U2.3@13.567,31.609 13.681,31.609 15.572,29.718 20.32,29.718 23.876,26.162 30.635,26.162 34.431,22.366 ; R5.2@13.792,26.285 13.792,27.432 ; IC1.8@15.4,8.42 15.442,8.377 15.88,8.377 16.637,7.62 26,7.62
  Bottom Layer w0.5: v1(7.493,22.987) 7.512,23.006 7.512,23.641 v1(8.636,24.765)
pads on no net: J4.P1 J4.P8 P1.4 P2.4 U1.2 U1.9 U1.10 U1.13 U1.19 U1.22 U1.23 U1.26 U1.27 U1.28

## Polygon pours and split planes (outlines as drawn)
GND on Bottom Layer "NONET_L-01_P-001" (solid, pour order 1): 0.127,58.547 63.754,58.547 63.881,58.42 63.881,0 0.127,0
GND on Top Layer "NONET_L-01_P-001" (solid, pour order 0): 0,58.42 64.008,58.42 64.008,0 0,0